# EAGLE board blink1mk3-prog-jig2 (EAGLE 9.2.2)
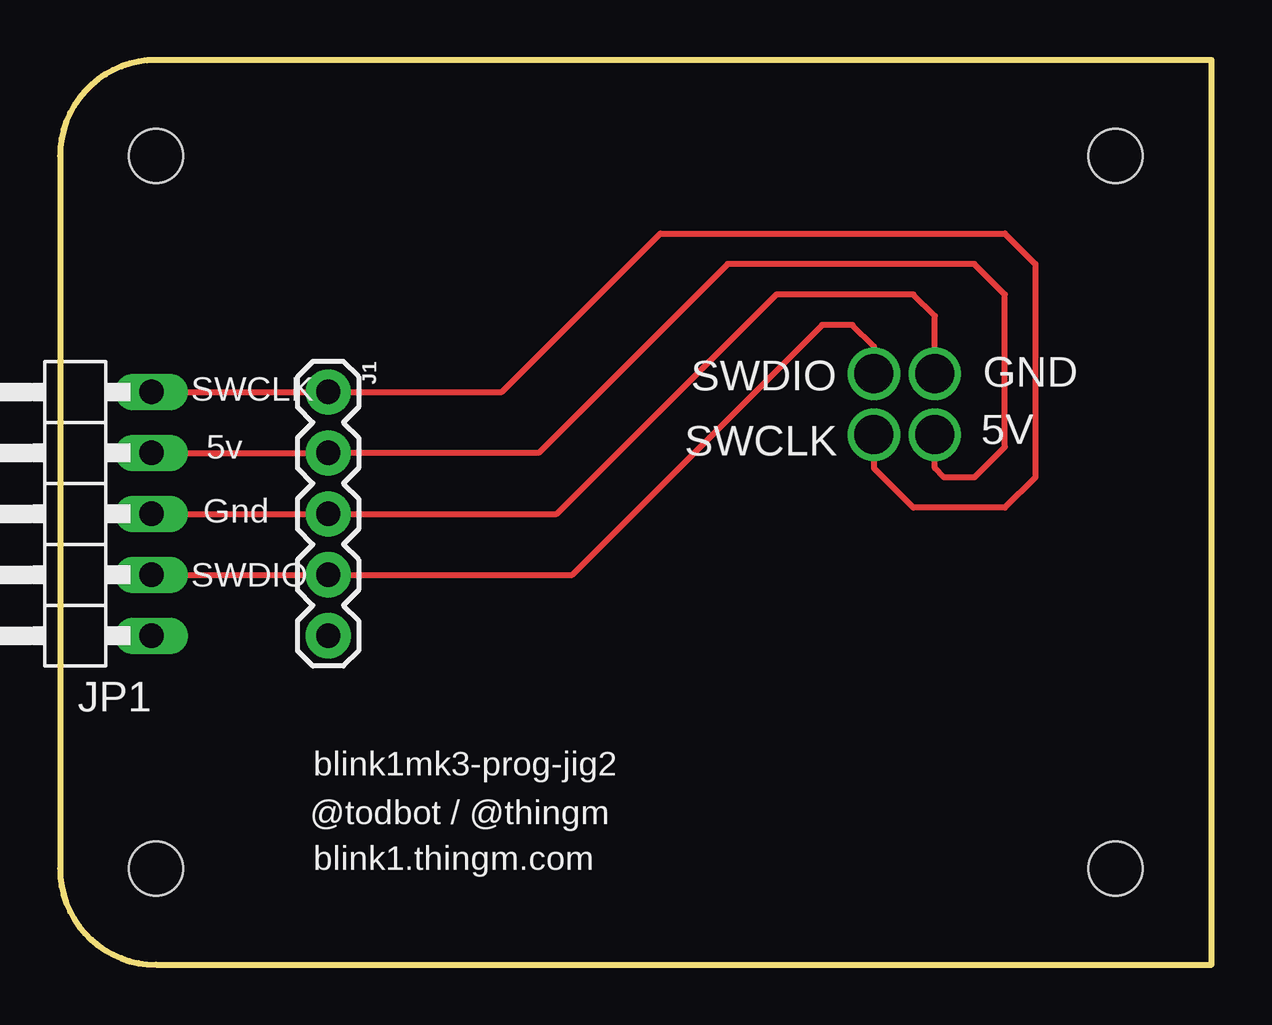
[diagram p0: board, top side]
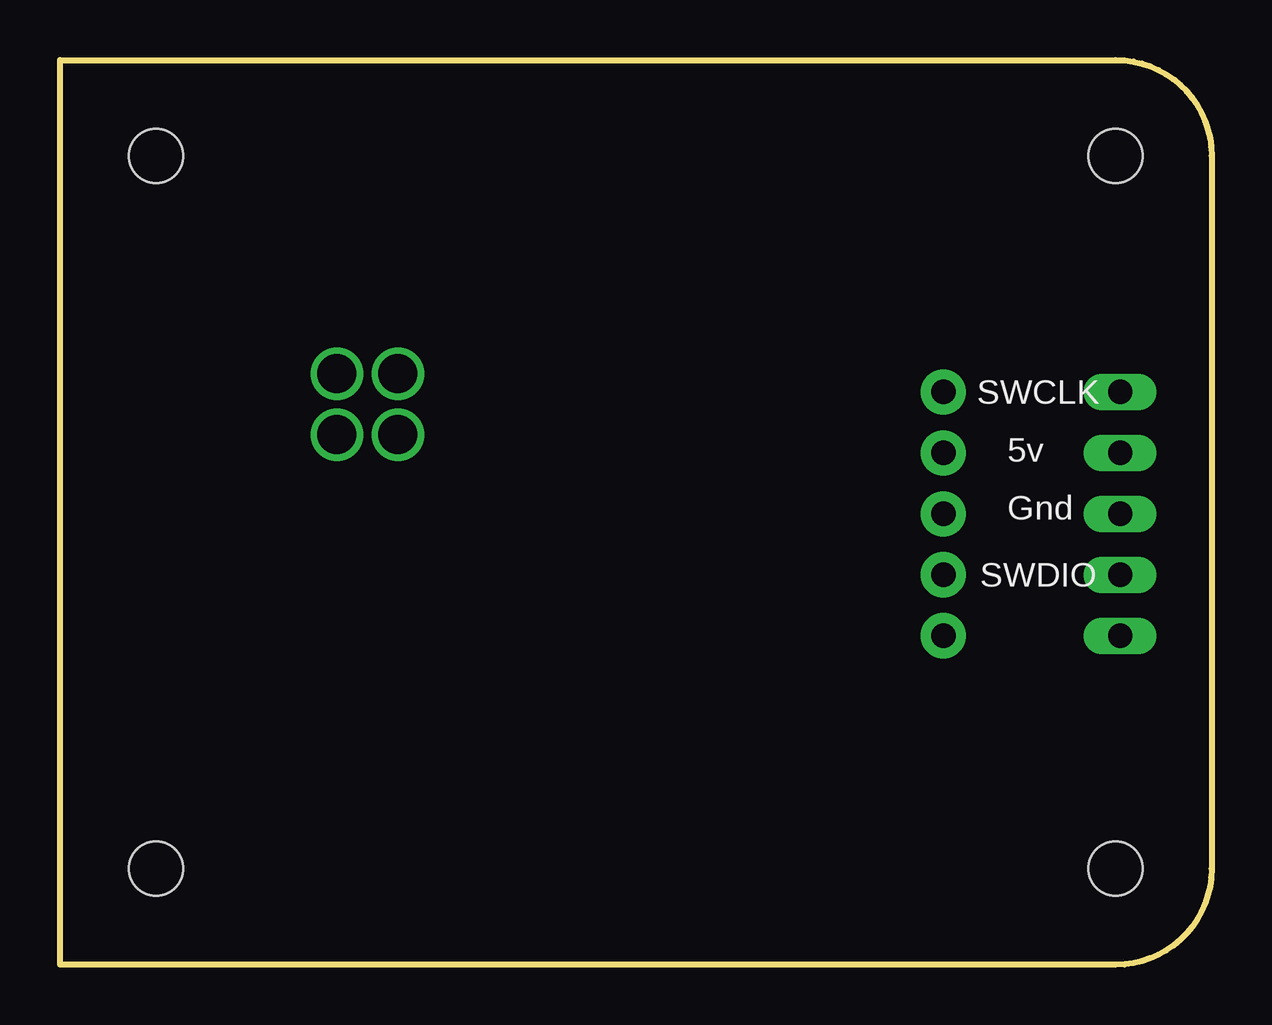
[diagram p1: board, bottom side, seen from below]

Size 47.99 x 37.72 mm. Coordinates in mm from the lower left corner, seen from the top.
Outline: 4,0 47.98,0 47.98,37.72 4,37.72 arc90 0,33.72 0,4 arc90 4,0
Copper layers (1*16): Top 0.035mm / dielectric 1.5mm / Bottom 0.035mm
Design rules "default *": minimum track width 6mil, minimum drill 0.35mm, track to track 6mil, track to pad 6mil, pad to pad 6mil, via to via 6mil, smd to smd 6mil, copper to edge 40mil, drill to drill 6mil, minimum pad ring 8mil, minimum via ring 8mil, stop-mask expansion 4mil, vias tented up to drill 0mil, thermal gap 10mil
Holes 2.25 mm at 4,4 43.99,33.72 4,33.72 43.99,4

## Footprints (pad centres in the part's own frame; a part is rotated, then mirrored left to right if it is on the bottom)
MILLMAX-0928-POGO-THRU = drill 1.626 pad 2.184: 1 0,0
1X05 = drill 1.016 pad 1.88: 1 0,0; 2 2.54,0; 3 5.08,0; 4 7.62,0; 5 10.16,0
1X05/90 = drill 1.016 long: 1 -5.08,-3.81; 2 -2.54,-3.81; 3 0,-3.81; 4 2.54,-3.81; 5 5.08,-3.81

## Placement (x,y rotation side)
5V  POGO1  [MILLMAX-0928-POGO-THRU]  36.45,22.1 180 top
GND  POGO1  [MILLMAX-0928-POGO-THRU]  36.45,24.64 180 top
J1  [1X05]  11.18,23.88 270 top
JP1  [1X05/90]  0,18.8 90 top
SWCLK  POGO1  [MILLMAX-0928-POGO-THRU]  33.91,22.1 180 top
SWDIO  POGO1  [MILLMAX-0928-POGO-THRU]  33.91,24.64 180 top

## Library data of the parts
5V GND SWCLK SWDIO = todstuff
J1 = SparkFun-Connectors
JP1 = pinhead

## Nets
5V: 5V.1 J1.2 JP1.4
GND: GND.1 J1.3 JP1.3
SWCLK: J1.1 JP1.5 SWCLK.1
SWDIO: J1.4 JP1.2 SWDIO.1

## Tracks (layer width: path | path; a pad name or v marks a point on that pad's centre or on a via)
5V
  Top 0.254: 36.45,22.23 36.45,20.7 36.83,20.32 38.1,20.32 39.37,21.59 39.37,27.94 38.1,29.21 27.81,29.21 19.94,21.34 J1.2 JP1.4
GND
  Top 0.203: J1.3 11.43,18.8 | 36.45,25.73 GND.1
  Top 0.254: 11.43,18.8 20.7,18.8 29.84,27.94 35.56,27.94 36.45,27.05 GND.1 | JP1.3 J1.3
SWCLK
  Top 0.203: J1.1 11.43,23.88
  Top 0.254: 11.43,23.88 18.41,23.88 25.02,30.48 39.37,30.48 40.64,29.21 40.64,20.32 39.37,19.05 35.56,19.05 33.91,20.7 SWCLK.1 | JP1.5 J1.1
SWDIO
  Top 0.203: J1.4 11.43,16.26
  Top 0.254: 11.43,16.26 21.34,16.26 31.75,26.67 33.02,26.67 33.91,25.78 SWDIO.1 | JP1.2 J1.4

## Text on the board
tPlace: SWCLK | 5v | Gnd | SWDIO | blink1mk3-prog-jig2 | @todbot / @thingm | blink1.thingm.com
bPlace: SWCLK | 5v | Gnd | SWDIO